# EAGLE board Sensor_Board_0x07_Heat_Flux (EAGLE 9.0.1)
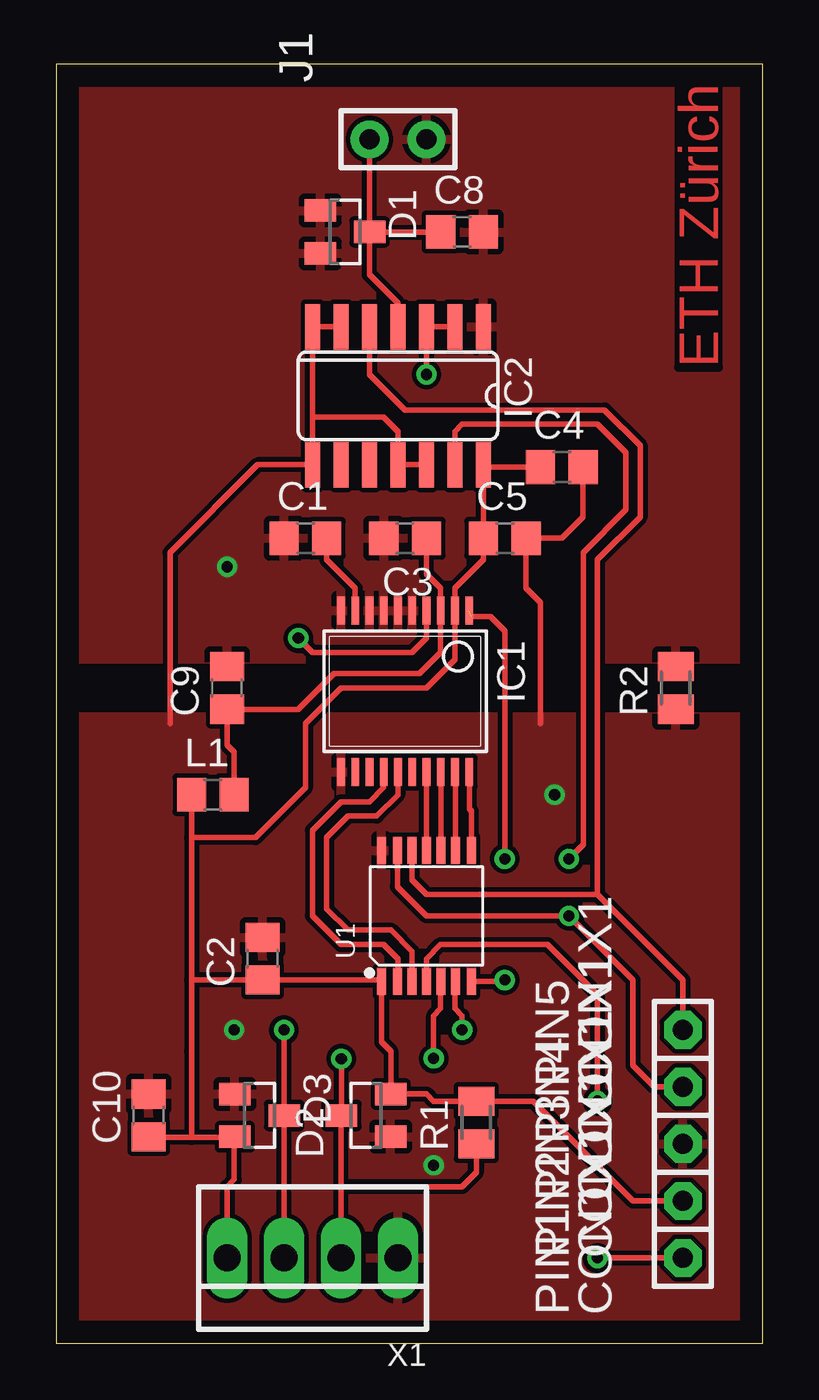
[diagram p0: board, top side]
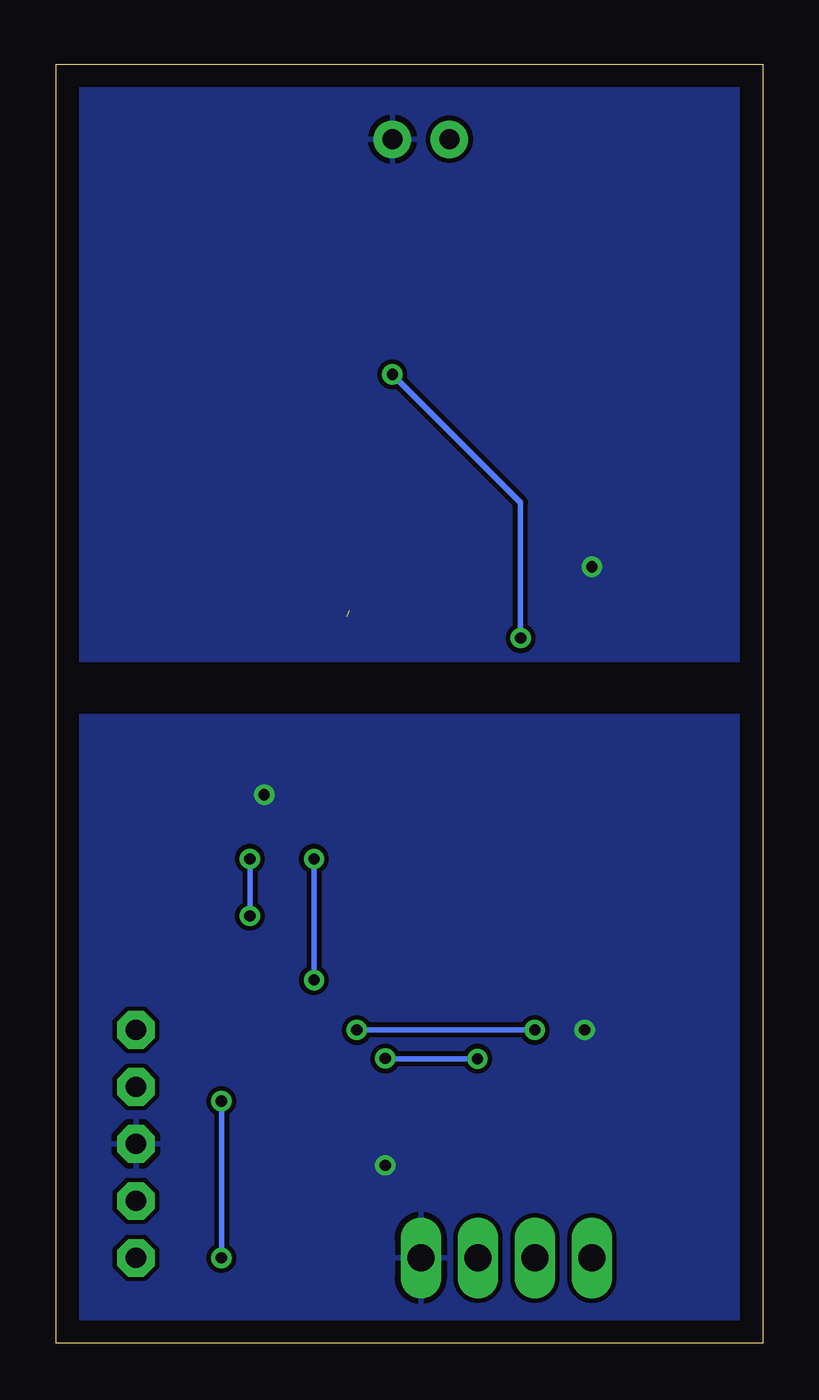
[diagram p1: board, bottom side, seen from below]

Size 31.5 x 57 mm. Coordinates in mm from the lower left corner, seen from the top.
Outline: 0,0 31.5,0 31.5,57 0,57 0,0
Copper layers (1*16): Top 0.035mm / dielectric 1.5mm / Bottom 0.035mm
Design rules "default *": minimum track width 10mil, minimum drill 24mil, track to track 8mil, track to pad 8mil, pad to pad 8mil, via to via 8mil, smd to smd 8mil, copper to edge 40mil, drill to drill 8mil, minimum pad ring 10mil, minimum via ring 8mil, stop-mask expansion 4mil, vias tented up to drill 0mil, thermal gap 10mil

## Footprints (pad centres in the part's own frame; a part is rotated, then mirrored left to right if it is on the bottom)
C0805 = smd 1.3 x 1.5: 1 -0.95,0; 2 0.95,0
SOT23 = smd 1 x 1.4: 1 -0.95,-1.1; 2 0.95,-1.1; 3 0,1.1
SSOP20 = smd 0.35 x 1.245: 1 -2.857,-3.45; 2 -2.222,-3.45; 3 -1.587,-3.45; 4 -0.952,-3.45; 5 -0.317,-3.45; 6 0.318,-3.45; 7 0.953,-3.45; 8 1.588,-3.45; 9 2.223,-3.45; 10 2.858,-3.45; 11 2.858,3.75; 12 2.223,3.75; 13 1.588,3.75; 14 0.953,3.75; 15 0.318,3.75; 16 -0.317,3.75; 17 -0.952,3.75; 18 -1.587,3.75; 19 -2.222,3.75; 20 -2.857,3.75
SO14 = smd 0.66 x 2.032: 1 -3.81,-3.073; 2 -2.54,-3.073; 3 -1.27,-3.073; 4 0,-3.073; 5 1.27,-3.073; 6 2.54,-3.073; 7 3.81,-3.073; 8 3.81,3.073; 9 2.54,3.073; 10 1.27,3.073; 11 0,3.073; 12 -1.27,3.073; 13 -2.54,3.073; 14 -3.81,3.073
CON2X1 = drill 0.9 pad 1.676: 1 0,0; 2 0,2.54
0805 = smd 1.3 x 1.5: 1 -0.95,0; 2 0.95,0
CON1X1 = drill 0.9 pad 1.676 octagon: 1 2.54,0
M0805 = smd 1.3 x 1.6: 1 -0.95,0; 2 0.95,0
TSSOP14-0.65-5X4.4MM = smd 0.4 x 1.2: 1 -2,-2.925; 2 -1.3,-2.925; 3 -0.65,-2.925; 4 0,-2.925; 5 0.65,-2.925; 6 1.3,-2.925; 7 2,-2.925; 8 2,2.925; 9 1.3,2.925; 10 0.65,2.925; 11 0,2.925; 12 -0.65,2.925; 13 -1.3,2.925; 14 -2,2.925
22-23-2041 = drill 1.2 long: 1 -3.81,0; 2 -1.27,0; 3 1.27,0; 4 3.81,0

## Placement (x,y rotation side)
C1  100n  [C0805]  11.11,35.88 0 top
C2  100n  [C0805]  9.21,17.14 90 top
C3  100n  [C0805]  15.56,35.88 180 top
C4  100n  [C0805]  22.54,39.05 0 top
C5  100n  [C0805]  20,35.88 0 top
C8  1u  [C0805]  18.1,49.53 0 top
C9  100n  [C0805]  7.62,29.21 90 top
C10  1u  [C0805]  4.13,10.16 90 top
D1  BAV99  [SOT23]  12.88,49.53 270 top
D2  BAV99  [SOT23]  13.82,10.16 90 top
D3  BAV99  [SOT23]  9.07,10.16 270 top
IC1  MCP3911A0-E/SS  [SSOP20]  15.56,29.21 180 top
IC2  4066D  [SO14]  15.24,42.23 180 top
J1  [CON2X1]  16.51,53.66 90 top
L1  74279220601  [0805]  6.99,24.45 0 top
PIN1  CON1X1  [CON1X1]  27.94,1.27 90 top
PIN2  CON1X1  [CON1X1]  27.94,3.81 90 top
PIN3  CON1X1  [CON1X1]  27.94,6.35 90 top
PIN4  CON1X1  [CON1X1]  27.94,8.89 90 top
PIN5  CON1X1  [CON1X1]  27.94,11.43 90 top
R1  10k  [M0805]  18.73,9.84 90 top
R2  0  [M0805]  27.62,29.21 90 top
U1  PIC16F1825-I/ST-TSSOP14  [TSSOP14-0.65-5X4.4MM]  16.51,19.05 0 top
X1  22-23-2041  [22-23-2041]  11.43,3.81 180 top

## Library data of the parts
C1-C5 C8-C10 = heatflow
D1-D3 = LEDXLamp
IC1 = heatflow; SPICEPREFIX: X
IC2 = 40xx
J1 PIN1-PIN5 = Stecker_Pins
L1 = heatflow2
R1 R2 = resistor
U1 = heatflow; MPN: PIC16F1825-I/ST
X1 = heatflow; MF: MOLEX; MPN: 22-23-2041; OC_FARNELL: 1462920; OC_NEWARK: 38C0355

## Nets
AD_CS: IC1.17 U1.11
AD_RESET: IC1.1 U1.7
ADCLK: IC1.15 U1.3
AGND: C1.1 C3.2 C8.2 C9.2 D1.1 D1.2 IC1.5 IC1.6 IC1.7 IC1.8 IC1.10 IC2.1 J1.1 R2.2
AVDD: C3.1 C9.1 IC1.3 L1.2
DATA_READY: IC1.14 U1.2
DGND: C2.2 C4.2 C5.2 C10.2 D2.1 D3.1 IC1.11 IC2.6 IC2.7 IC2.8 IC2.11 IC2.12 PIN3.1 R2.1 U1.14 X1.1
DVDD: C2.1 C4.1 C5.1 C10.1 D2.2 D3.2 IC1.2 IC2.14 L1.1 PIN2.1 R1.2 U1.1 X1.4
INPUT_EN: IC2.5 PIN5.1 U1.12
MCLR: PIN1.1 U1.4
MISO: IC1.19 U1.9
MOSI: IC1.20 U1.8
N$2: C1.2 IC1.9
N$8: IC1.4 IC2.2 IC2.3
N$12: C8.1 D1.3 IC2.4 J1.2
RXI: D2.3 R1.1 U1.5 X1.2
SCK: IC1.18 U1.10
SHORT: IC2.13 PIN4.1 U1.13
TXO: D3.3 U1.6 X1.3

## Tracks (layer width: path | path; a pad name or v marks a point on that pad's centre or on a via)
AD_CS
  Top 0.254: U1.11 16.51,25.61 IC1.17
AD_RESET  (via drill 0.5)  (1 unrouted)
  Top 0.254: U1.7 19.93,16.12 v20,16.19 | 18.54,32.38 19.37,32.38 20,31.75 v20,21.59
  Bottom 0.254: v20,21.59 v20,16.19
ADCLK
  Top 0.254: IC1.15 15.24,24.45 14.29,23.5 13.02,23.5 12.06,22.54 12.06,19.37 13.02,18.41 14.92,18.41 15.88,17.46 15.88,16.14 U1.3
AGND  (via drill 0.5)
  other vias: 7.62,34.61
  pour Top: -2.54,30.48 -2.54,59.69 34.29,59.69 34.29,30.48
  pour Bottom: -1.27,30.48 33.02,30.48 33.02,58.42 -1.27,58.42
AVDD
  Top 0.254: C3.1 16.51,34.29 17.14,33.66 IC1.3 17.14,32.51 17.14,30.8 16.19,29.84 12.38,29.84 10.79,28.26 C9.1 7.62,26.67 7.94,26.35 L1.2
DATA_READY
  Top 0.254: IC1.14 14.6,24.77 13.97,24.13 12.7,24.13 11.43,22.86 11.43,19.05 12.7,17.78 14.61,17.78 15.24,17.14 15.24,16.16 U1.2
DGND  (via drill 0.5)
  Top 0.254: IC2.6 IC2.7 11.43,41.27 | 11.43,41.27 IC2.8 8.99,39.15 5.08,35.24 5.08,27.62 | IC2.12 IC2.11 15.24,40.64 14.61,41.27 11.43,41.27 | C4.2 23.49,36.83 22.54,35.88 C5.2 20.95,33.66 21.59,33.02 21.59,27.62
  other vias: 16.83,7.94 7.94,13.97 22.23,24.45
  pour Top: -2.54,-2.54 -2.54,27.94 34.29,27.94 34.29,-2.54
  pour Bottom: -2.54,-2.54 -2.54,27.94 34.29,27.94 34.29,-2.54
DVDD
  Top 0.254: 7.94,9.18 7.94,7.3 7.62,6.99 X1.4 | 7.94,9.18 D3.2 | 7.94,9.18 6.03,9.18 | 6.03,9.18 4.16,9.18 C10.1 | 6.03,9.18 6.03,13.02 6.04,13.02 6.04,16.19 | PIN2.1 25.72,6.35 21.27,10.79 R1.2 16.83,10.79 16.51,11.11 D2.2 14.92,13.02 14.51,13.43 U1.1 14.44,16.2 C2.1 6.04,16.2 6.04,16.19 | L1.1 6.04,22.54 | 6.04,22.54 6.04,16.19 | C4.1 20.64,39.05 20.32,39.05 19.15,39.05 IC2.14 C5.1 19.05,34.92 17.78,33.65 IC1.2 17.78,30.48 16.51,29.21 12.7,29.21 11.11,27.62 11.11,24.77 8.89,22.54 6.04,22.54
INPUT_EN
  Top 0.254: U1.12 15.86,20.65 16.51,20 24.13,20 | 24.13,20 27.94,16.19 PIN5.1 | IC2.5 13.97,43.18 15.56,41.59 24.45,41.59 26.04,40.01 26.04,36.83 24.13,34.92 24.13,20
MCLR  (via drill 0.5)
  Top 0.254: U1.4 16.51,17.14 17.14,17.78 21.91,17.78 24.13,15.56 v24.13,10.79 | v24.13,3.81 PIN1.1
  Bottom 0.254: v24.13,10.79 v24.13,3.81
MISO
  Top 0.254: U1.9 17.81,25.58 IC1.19
MOSI
  Top 0.254: U1.8 18.51,23.72 18.41,23.81 18.41,25.61 IC1.20
N$2
  Top 0.254: IC1.9 13.34,33.66 12.06,34.92 C1.2
N$8  (via drill 0.5)
  Top 0.254: IC2.2 IC2.3 v16.51,43.18 | IC1.4 16.51,31.43 15.88,30.8 11.43,30.8 v10.79,31.43
  Bottom 0.254: v10.79,31.43 10.79,37.47 v16.51,43.18
N$12
  Top 0.254: IC2.4 15.24,46.35 13.97,47.62 13.97,48.89 D1.3 | D1.3 C8.1 | D1.3 13.98,53.33 J1.2
RXI  (via drill 0.5)
  Top 0.254: X1.2 12.7,6.99 | 12.7,6.99 12.7,10.14 D2.3 v12.72,12.68 12.7,12.7 | v16.83,12.7 16.83,14.61 17.14,14.92 17.14,16.11 U1.5 | R1.1 18.73,7.62 18.1,6.99 12.7,6.99
  Bottom 0.254: v12.72,12.68 16.81,12.68 v16.83,12.7
SCK
  Top 0.254: U1.10 17.16,25.59 IC1.18
SHORT  (via drill 0.5)
  Top 0.254: U1.13 15.21,20.35 16.51,19.05 v22.86,19.05 25.72,16.19 25.72,12.38 26.67,11.43 PIN4.1 | IC2.13 17.78,40.64 18.1,40.96 24.13,40.96 25.4,39.69 25.4,37.15 23.5,35.24 23.5,22.23 v22.86,21.59
  Bottom 0.254: v22.86,21.59 v22.86,19.05
TXO  (via drill 0.5)
  Top 0.254: X1.3 D3.3 v10.17,13.96 v10.16,13.97 | v18.1,13.97 18.1,14.61 17.78,14.92 17.78,16.09 U1.6
  Bottom 0.254: v10.16,13.97 v18.1,13.97

## Text on the board
Top: ETH Zürich